# Altium PCB AlarmShield.PcbDoc (part 1 of 2)
Units mil, origin at the board's own origin, x right, y up, seen from the top; angles counter-clockwise.
Board outline 3700 x 2700 mil, 2 copper layers (Top Layer, Bottom Layer), stack 61.811 mil thick; 100 components, 79 nets, 356 pads, 76 vias.
Unrouted connection lines stored in the file: 2.
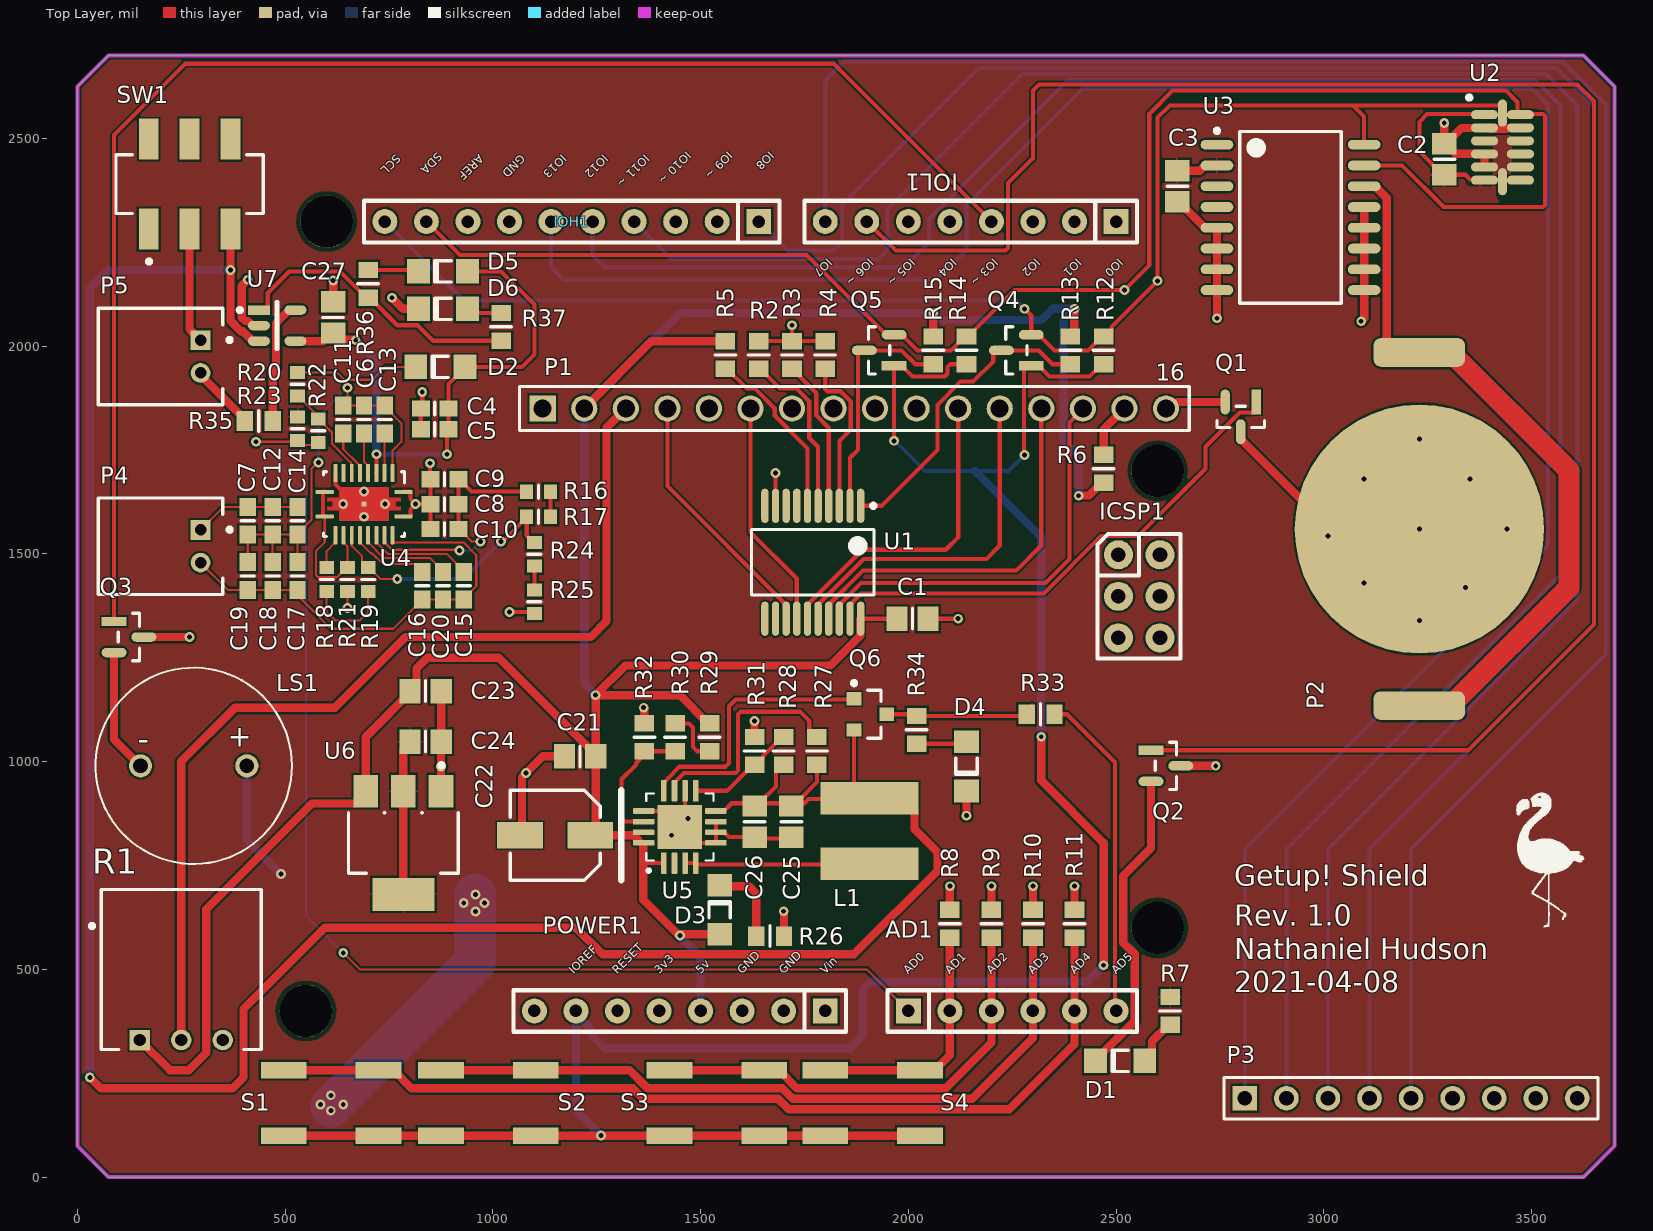
[diagram p0: Top Layer view]
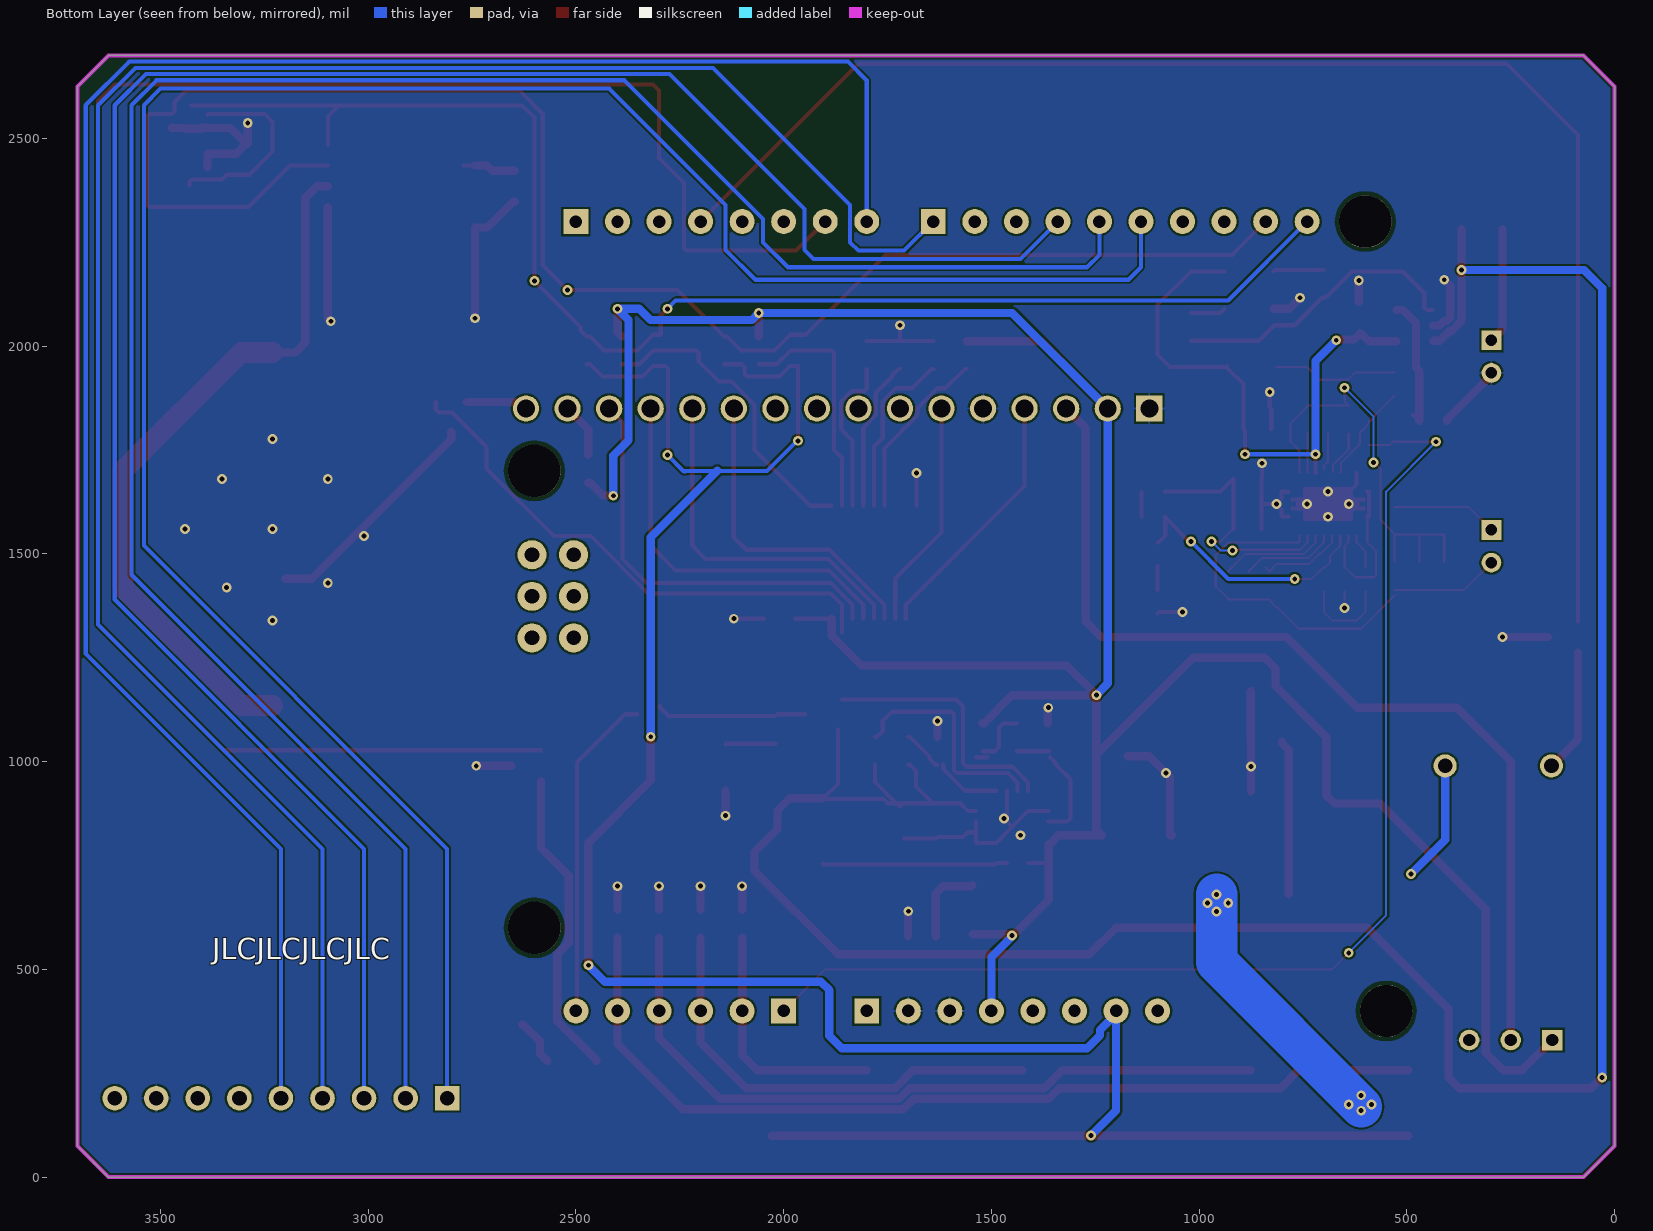
[diagram p1: Bottom Layer view, seen from below]

## Layer stack, top to bottom
Top Solder: solder mask 0.5, Solder Resist, Dk 3.8
Top Layer: signal copper 1.378
Dielectric: core 59.0551, FR-4, Dk 4.5
Bottom Layer: signal copper 1.378
Bottom Solder: solder mask 0.5, Solder Resist, Dk 3.8

## Board outline
0,75 0,2625 75,2700 3625,2700 3700,2625 3700,75 3625,0 75,0

## Design rules (kind name [scope] priority, off if disabled: settings)
BoardOutlineClearance [All] p1: gap=7.87 ignorepadtopadclearanceinfootprint=FALSE
Clearance [All] p1: gap=5 ignorepadtopadclearanceinfootprint=FALSE except(9.84: Arc-Hole Track-Hole SMDPad-Hole THPad-Hole Via-Hole Fill-Hole Poly-Hole Region-Hole Text-Hole)
ComponentClearance [All] p1: gap=5 collisioncheckmode=3 verticalgap=5 showdistances=TRUE
DiffPairsRouting [All] p1: maxlimit=10 minlimit=5 mostfreqgap=5 toplayer_minwidth=5 toplayer_maxwidth=1000 toplayer_prefwidth=5 bottomlayer_minwidth=5 bottomlayer_maxwidth=1000 bottomlayer_prefwidth=5 maxuncoupledlength=500
Height [All] p1: minheight=0 maxheight=71497.94 prefheight=500
HoleSize [All] p1: absolutevalues=TRUE maxlimit=248.03 minlimit=11.81 maxpercent=80.000 minpercent=20.000
HoleToHoleClearance [All] p1: gap=9.84 allowstackedmicrovias=FALSE
MinimumAnnularRing [All] p1: minimumring=3
MinimumSolderMaskSliver [All] p1: minsoldermaskwidth=0
PlaneClearance [All] p1: clearance=5
PlaneConnect PlaneConnectPowerPads [InPadClass('PowerPads')] p1: planeconnectstyle=Direct reliefexpansion=20 reliefentries=4 reliefconductorwidth=10 reliefairgap=10
PlaneConnect [All] p2: pad.planeconnectstyle=Relief pad.reliefexpansion=11.81 pad.reliefentries=4 pad.reliefconductorwidth=5 pad.reliefairgap=5 via.planeconnectstyle=Direct via.reliefexpansion=11.81 via.reliefentries=4 via.reliefconductorwidth=5 via.reliefairgap=5
PolygonConnect PolygonConnectPowerPads [All vs (InPadClass('PowerPads'))] p1: connectstyle=Direct reliefconductorwidth=10 reliefentries=4 polygonreliefangle="90 Angle" airgapwidth=10
PolygonConnect [All] p2: thpad.connectstyle=Relief thpad.reliefconductorwidth=5 thpad.reliefentries=4 thpad.polygonreliefangle="90 Angle" thpad.airgapwidth=5 smdpad.connectstyle=Relief smdpad.reliefconductorwidth=5 smdpad.reliefentries=4 smdpad.polygonreliefangle="90 Angle" smdpad.airgapwidth=5 via.connectstyle=Direct via.reliefconductorwidth=5 via.reliefentries=4 via.polygonreliefangle="90 Angle" via.airgapwidth=5
RoutingVias [All] p1: holewidth=11.81 width=23.62 viastyle="Through Hole" minholewidth=11.81 minwidth=23.62 maxholewidth=23.62 maxwidth=259.84
SilkToSilkClearance [All] p1: silktosilkclearance=0
SilkToSolderMaskClearance [IsPad] p1: minsilkscreentomaskgap=5 clearancetoexposedcopper=TRUE
SolderMaskExpansion [All] p1: expansion=2.95 istentingtop=FALSE
Width [All] p1: maxlimit=1000 minlimit=5 preferedwidth=5 minimp=50.000000 maximp=50.000000 favimp=50.000000
20 further rules are at their usual default settings.

## Classes and differential pairs
component class Power: C4 C5 C6 C7 C8 C9 C10 C11 C12 C13 C14 C15 C16 C17 C18 C19 C20 C21 C22 C23 C24 C25 C26 C27 D2 D3 D4 D5 D6 L1 P4 P5 Q6 R16 R17 R18 R19 R20 R21 R24 R26 R28 R30 R32 R35 R36 R37 SW1 U4 U5 U6 U7
component class AlarmShield: AD1 C1 C2 C3 D1 ICSP1 IOH1 IOL1 LS1 P1 P2 P3 POWER1 Q1 Q2 Q3 Q4 Q5 R1 R2 R3 R4 R5 R6 R7 R8 R9 R10 R11 R12 R13 R14 R15 S1 S2 S3 S4 U1 U2 U3

## Components (designator, comment, footprint, x,y, rotation, side; value= is the part's Value field where it differs from the comment)
AD1 "AD" "Header 6x1 8.5mm" 2000,400 r0 top locked
C1 "1uF" 0805 2010.21,1344.17 r0 top
C2 ".1uF" 0805 3290,2450 r90 top
C3 "1uF" 0805 2647.47,2385 r270 top
C4 "10uF" 0603 860,1850 r0 top
C5 "0.1uF" 0603 860,1800 r0 top
C6 "0.47uF" 0603 690,1823.46 r90 top
C7 "0.12uF" 0603 410,1579.94 r90 top
C8 "10uF" 0603 883.46,1620 r0 top
C9 "10uF" 0603 883.46,1680 r0 top
C10 "0.1uF" 0603 883.46,1560 r0 top
C11 "0.22uF" 0603 640,1823.46 r90 top
C12 "C-NP" 0603 470,1579.94 r90 top
C13 "10nF" 0603 740,1823.46 r90 top
C14 "C-NP" 0603 530,1579.94 r90 top
C15 "10nF" 0603 930,1423.46 r270 top
C16 "0.22uF" 0603 830,1423.46 r270 top
C17 "2000pF" 0603 530,1446.87 r270 top
C18 "C-NP" 0603 470,1446.87 r270 top
C19 "C-NP" 0603 410,1446.87 r270 top
C20 "0.47uF" 0603 880,1423.46 r270 top
C21 "2.2uF" 0805 1210,1012.91 r180 top
C22 "100uF" PNSC-FP-V-C_V 1150,822.91 r180 top
C23 "10uF" 0805 838.15,1170 r0 top
C24 "10uF" 0805 838.15,1048.39 r0 top
C25 "10uF" 0805 1718.39,855.71 r270 top
C26 "0.1uF" 0805 1630,855.71 r270 top
C27 "10uF" 0805 615.75,2069.32 r90 top
D1 "Blue" 1206_A_LED 2510,280 r0 top
D2 "Yellow" 1206_A_LED 873.58,1950 r0 top
D3 "Blue" 1206_A_LED 1545.63,643.58 r270 top
D4 "Yellow" 1206_A_LED 2140,988.94 r90 top
D5 "Yellow" 1206_A_LED 880,2180 r0 top
D6 "Blue" 1206_A_LED 880,2090 r0 top
ICSP1 "ICSP" ICSP 2505.51,1498.03 r0 top locked
IOH1 "IOH" "Header 10x1 8.5mm" 1640,2300 r180 top locked
IOL1 "IOL" "Header 8x1 8.5mm" 2500,2300 r180 top locked
L1 "MSS6132-472MLB" "COILCRAFT MSS6132 SERIES" 1906.54,912.09 r180 top
LS1 "CMT-1285C-035" CUI_CMT-1285C-035 280,990 r180 top
P1 "Display Header" 61301611121 1870,1850 r0 top
P2 "BH-67B-5" PCBComponent_1 3230,1135 r90 top
P3 "BT Header" HDR1X9 2810,190 r0 top
P4 "Coil" JST-S2B-PH-K-S_V 200,1518.41 r270 top
P5 "Lipo" JST-S2B-PH-K-S_V 200,1975 r270 top
POWER1 "POWER_UNO" "Header 8x1 8.5mm" 1800,400 r180 top locked
Q1 "BSS138" FP-318-08-IPC_B 2800,1830 r270 top
Q2 "BSS138" FP-318-08-IPC_B 2620,990 r0 top
Q3 "BSS138" FP-318-08-IPC_B 124.17,1300 r0 top
Q4 "BSS138" FP-318-08-IPC_B 2260,1990 r180 top
Q5 "BSS138" FP-318-08-IPC_B 1930,1990 r180 top
Q6 "MMUN2133LT1G" ONSC-SOT-23-3-318-08_V 1908.74,1114.14 r0 top
R1 "100k" FP-3386T-MFG 250,500 r0 top
R2 "10k" 0805_RES_HD 1640,1978.82 r90 top
R3 "10k" 0805_RES_HD 1720,1978.82 r90 top
R4 "10k" 0805_RES_HD 1800,1978.82 r90 top
R5 "10k" 0805_RES_HD 1559.8,1978.82 r90 top
R6 "220" 0805_RES_HD 2470,1704.95 r90 top
R7 "220" 0805_RES_HD 2630,400 r90 top
R8 "10k" 0805_RES_HD 2100,610 r270 top
R9 "10k" 0805_RES_HD 2200,610 r270 top
R10 "10k" 0805_RES_HD 2300,610 r270 top
R11 "10k" 0805_RES_HD 2400,610 r270 top
R12 "10k" 0805_RES_HD 2470,1990 r90 top
R13 "10k" 0805_RES_HD 2390,1990 r270 top
R14 "10k" 0805_RES_HD 2140,1990 r90 top
R15 "10k" 0805_RES_HD 2060,1990 r270 top
R16 "10k" 0603_RES_HD 1110,1649.49 r0 top
R17 "10k" 0603_RES_HD 1110,1589.49 r180 top
R18 "33" 0603_RES_HD 600,1438.54 r270 top
R19 "33" 0603_RES_HD 700,1438.54 r90 top
R20 "1.5k" 0603_RES_HD 530,1908.54 r270 top
R21 "10k" 0603_RES_HD 650,1438.54 r270 top
R22 "0" 0603_RES_HD 580,1796.54 r90 top
R23 "10k" 0603_RES_HD 530,1801.46 r270 top
R24 "150" 0603_RES_HD 1100,1499.17 r90 top
R25 "47" 0603_RES_HD 1100,1384.86 r90 top
R26 "1.5k" 0805_RES_HD 1667.2,580 r180 top
R27 "330k" 0805_RES_HD 1780,1025.95 r90 top
R28 "1.8M" 0805_RES_HD 1700,1025.95 r270 top
R29 "1.8M" 0805_RES_HD 1521.69,1058.75 r90 top
R30 "50k" 0805_RES_HD 1438.9,1058.75 r270 top
R31 "330k" 0805_RES_HD 1630,1025.95 r270 top
R32 "50k" 0805_RES_HD 1364.72,1058.75 r90 top
R33 "0" 0805_RES_HD 2318.4,1114.14 r180 top
R34 "1.5k" 0805_RES_HD 2020,1076.54 r90 top
R35 "2k" 0805_RES_HD 436.54,1820 r180 top
R36 "470" 0805_RES_HD 700,2150 r270 top
R37 "1k" 0805_RES_HD 1020,2046.54 r270 top
S1 "KSC221J" "ITT Cannon KSC2 Series" 496.65,100 r0 top
S2 "KSC221J" "ITT Cannon KSC2 Series" 875,100 r0 top
S3 "KSC221J" "ITT Cannon KSC2 Series" 1425,100 r0 top
S4 "KSC221J" "ITT Cannon KSC2 Series" 1800,100 r0 top
SW1 "JS202011SCQN" FP-JS202011SCQN-MFG 270,2390 r0 top
U1 "MCP23008-E/SS" SSOP-SS20_N 1770,1480 r270 top
U2 "ADI-ADXL34X-CC-14-1" ADXL 3430,2478.44 r0 top
U3 "DS3231S" W16-H2_L 2920,2310 r0 top
U4 "BQ51013BRHLR" RHL0020A_V 690,1620 r270 top
U5 "TPS61090RSAR" QFN65P400X400X100-17N 1450,842.91 r90 top
U6 "NCP1117LPST33T3G" FP-318H-MFG 784.65,804.53 r270 top
U7 "MCP73831T-2DCI/OT" FP-C04-091-OT-IPC_B 480.89,2049.63 r0 top

## Footprints (in the part's own frame and the unit in brackets; to place one, negate y for a bottom-side part, rotate by r counter-clockwise, add the part's x,y. Pads: shape width x height; smd on the part's side, far side on the other; paste and mask are expansions set on the pad)
0603 [mm] "Chip Capacitor; Body 1.6 x 0.8 mm (LxW typ)"
  rect 1.1x1 smd: 1(-0.85,0) 2(0.85,0)
  silkscreen extent 0,-0.4 0,0.4, body extent -0.8,-0.4 0.8,0.4, height 1
0603_RES_HD [mm] "Chip Resistor, 2-Leads, Body 1.60x0.85mm, IPC High Density"
  rect 0.8x0.9 smd: 1(-0.725,0) 2(0.725,0)
  silkscreen extent 0,-0.4 0,0.4, body extent -0.87,-0.48 0.87,0.48, height 0.55
0805 [mm] "Chip Capacitor; Body 2.0 x 1.2 mm (LxW typ)"
  rect 1.3x1.5 smd: 1(-0.95,0) 2(0.95,0)
  silkscreen extent 0,-0.64 0,0.64, body extent -1,-0.6 1,0.6, height 1.5
0805_RES_HD [mm] "Chip Resistor, 2-Leads, Body 2.00x1.25mm, IPC High Density"
  rect 1x1.2 smd: 1(-0.85,0) 2(0.85,0)
  silkscreen extent 0,-0.64 0,0.64, body extent -1.1,-0.68 1.1,0.67, height 0.65
1206_A_LED [mm] "Chip LED, 2-Leads, Body 3.2x1.6mm, IPC Medium Density"
  rect 1.4x1.5 smd: 1(-1.5,0) 2(1.5,0)
  silkscreen extent -0.5,-0.66 0.5,0.65, body extent -1.6,-0.8 1.6,0.8, height 0.68
61301611121 [mm] "Pin Header, pitch 2.54 mm, THT, Vertical, single row, 16p"
  round 1.6 hole 1.1: DB0(-3.81,0) DB1(-1.27,0) DB2(1.27,0) DB3(3.81,0) DB4(6.35,0) DB5(8.89,0) DB6(11.43,0) DB7(13.97,0) E(-6.35,0) LED+(16.51,0) LED-(19.05,0) R/W(-8.89,0) RS(-11.43,0) V0(-13.97,0) VDD(-16.51,0)
  rect 1.6x1.6 hole 1.1: VSS(-19.05,0)
  silkscreen extent -20.47,-1.35 20.47,1.35, body extent -20.32,-1.27 20.32,1.27, height 8.57
ADXL [mm] "QFN, 14-Leads, Body 5x3mm, Pitch 0.8mm"
  oval 1.653x0.55 smd: 1(-1.098,2) 2(-1.098,1.2) 3(-1.098,0.4) 4(-1.098,-0.4) 5(-1.098,-1.2) 6(-1.098,-2) 8(1.097,-2) 9(1.097,-1.2) 10(1.097,-0.4) 11(1.097,0.4) 12(1.097,1.2) 13(1.097,2)
  oval 0.55x1.653 smd: 7(0,-2.097) 14(0,2.098)
  silkscreen extent -2.16,2.92 -1.91,3.17, body extent -1.5,-2.5 1.5,2.5, height 1
"COILCRAFT MSS6132 SERIES" [mm] "SMT Power Inductor"
  rect 6x2 smd: 1(0,0) 2(0,4)
  body extent -3.1,-1.1 3.1,5.1, height 3.2
CUI_CMT-1285C-035 [mm]
  round 1.408 hole 0.9: N(3.25,0) P(-3.25,0)
  silkscreen extent -6,-6 6,6
FP-318-08-IPC_B [mm]
  rect 1.524x0.578 smd paste+0 mask+0: 1(-0.91,0.95)
  rrect100% 1.524x0.578 smd paste+0 mask+0: 2(-0.91,-0.95) 3(0.91,0)
  silkscreen extent -0.65,-1.45 0.65,1.45, body extent -1.92,-1.7 1.92,1.7, height 0.25
FP-318H-MFG [mm]
  rect 2x1.5 smd paste+0 mask+0: 1(-3.15,2.3) 2(-3.15,0) 3(-3.15,-2.3)
  rect 2x3.8 smd paste+0 mask+0: 4(3.15,0)
  silkscreen extent -4.87,-3.35 1.85,3.35, body extent -4.25,-3.68 4.25,3.68, height 0.25
FP-3386T-MFG [mm]
  rect 1.25x1.25 hole 0.75 paste-1000 mask+0: 1(-2.54,-4.318)
  round 1.25 hole 0.75 paste-1000 mask+0: 2(0,-4.318) 3(2.54,-4.318)
  silkscreen extent -5.57,-4.89 4.89,4.89, body extent -4.99,-4.99 4.99,4.99, height 0.25
FP-C04-091-OT-IPC_B [mm]
  rect 1.338x0.578 smd paste+0 mask+0: 1(-1.116,0.95)
  rrect100% 1.338x0.578 smd paste+0 mask+0: 2(-1.116,0) 3(-1.116,-0.95) 4(1.116,-0.95) 5(1.116,0.95)
  silkscreen extent -2.41,-1.45 0.05,1.45
FP-JS202011SCQN-MFG [mm]
  rect 1.2x2.5 smd paste+0 mask+0: 1(-2.5,-2.75) 2(0,-2.75) 3(2.5,-2.75) 4(-2.5,2.75) 5(0,2.75) 6(2.5,2.75)
  silkscreen extent -4.5,-4.85 4.5,1.8
HDR1X9 [mm] "Connector; Header; 9 Position"
  rect 1.5x1.5 hole 0.9: 1(0,0)
  round 1.5 hole 0.9: 2(2.54,0) 3(5.08,0) 4(7.62,0) 5(10.16,0) 6(12.7,0) 7(15.24,0) 8(17.78,0) 9(20.32,0)
  silkscreen extent -1.27,-1.27 21.59,1.27
"Header 6x1 8.5mm" [mil] "Stackable 6 pin header"
  rect 60x60 hole 30: 1(0,0)
  round 60 hole 30: 2(100,0) 3(200,0) 4(300,0) 5(400,0) 6(500,0)
  silkscreen extent -50,-50 550,50, body extent -50,-50 550,50, height 335
"Header 8x1 8.5mm" [mil] "Stackable 8 pin header"
  rect 60x60 hole 30: 1(0,0)
  round 60 hole 30: 2(100,0) 3(200,0) 4(300,0) 5(400,0) 6(500,0) 7(600,0) 8(700,0)
  silkscreen extent -50,-50 750,50, body extent -50,-50 750,50, height 335
"Header 10x1 8.5mm" [mil] "Stackable 10 pin header"
  rect 60x60 hole 30: 1(0,0)
  round 60 hole 30: 2(100,0) 3(200,0) 4(300,0) 5(400,0) 6(500,0) 7(600,0) 8(700,0) 9(800,0) 10(900,0)
  silkscreen extent -50,-50 950,50, body extent -50,-50 950,50, height 335
ICSP [mil]
  round 70 hole 35.43: 1(0,0) 2(100,0) 3(0,-100) 4(100,-100) 5(0,-200) 6(100,-200)
  silkscreen extent -50,-250 150,50, body extent -50,-250 150,50, height 485
"ITT Cannon KSC2 Series" [mm] "SWITCH TACT SILVER J-LEAD"
  rect 2.8x1 smd: 1(0,0) 1(5.8,0) 2(0,4) 2(5.8,4)
  body extent -0.5,-1.4 6.3,5.4, height 3.55
JST-S2B-PH-K-S_V [mm] "THD, 2-Leads, Body 7.6x5.9mm, Pitch 2mm"
  rect 1.2x1.2 hole 0.7: 1(-1,2.45)
  round 1.2 hole 0.7: 2(1,2.45)
  silkscreen extent -2.95,-3.8 2.95,4.35, body extent -2.95,-3.8 2.95,3.8, height 4.8
ONSC-SOT-23-3-318-08_V [mm] "SOT23, 3-Leads, Body 2.92x1.3mm, Pitch 0.95mm"
  rect 0.9x0.8 smd: 1(-1,0.95) 2(-1,-0.95) 3(1,0)
  silkscreen extent -1.12,-1.46 0.65,2.02, body extent -0.65,-1.46 0.65,1.46, height 1.11
PCBComponent_1 [mil]
  rrect50% 69x220 smd: 1(0,0) 1(850,0)
  round 600 smd: 2(425,0)
PNSC-FP-V-C_V [mm] "CAPAE, 2-Leads, Body 5.50x5.50mm"
  rect 2.8x1.6 smd: 1(-2.15,0) 2(2.15,0)
  silkscreen extent -4.05,-2.75 2.75,2.75, body extent -3.25,-2.75 3.25,2.75, height 6.1
QFN65P400X400X100-17N [mm]
  rrect30% 1.318x0.34 smd: 1(-2.209,0.975) 2(-2.209,0.325) 3(-2.209,-0.325) 4(-2.209,-0.975) 9(2.209,-0.975) 10(2.209,-0.325) 11(2.209,0.325) 12(2.209,0.975)
  rrect30% 0.34x1.318 smd: 5(-0.975,-2.209) 6(-0.325,-2.209) 7(0.325,-2.209) 8(0.975,-2.209) 13(0.975,2.209) 14(0.325,2.209) 15(-0.325,2.209) 16(-0.975,2.209)
  rect 2.7x2.7 smd paste-0.497: 17(0,0)
  silkscreen extent -2.77,-2.05 2.05,2.05, body extent -2,-2 2,2, height 1
RHL0020A_V [mm] "QFN, 20-Leads, Body 4.5x3.5mm, Pitch 0.5mm, Thermal Pad 3.05x2.05mm, TI Recommended"
  rrect42% 0.24x1.108 smd: 1(-0.75,2.404) 10(-0.75,-2.404) 11(0.75,-2.404) 20(0.75,2.404)
  rrect42% 1.108x0.24 smd: 2(-1.904,1.75) 3(-1.904,1.25) 4(-1.904,0.75) 5(-1.904,0.25) 6(-1.904,-0.25) 7(-1.904,-0.75) 8(-1.904,-1.25) 9(-1.904,-1.75) 12(1.904,-1.75) 13(1.904,-1.25) 14(1.904,-0.75) 15(1.904,-0.25) 16(1.904,0.25) 17(1.904,0.75) 18(1.904,1.25) 19(1.904,1.75)
  rrect33% 0.3x0.3 smd paste-0.15 mask+0: 21(0,0)
  Top Layer region: 0.16,2.25 0.16,1.925 -0.16,1.925 -0.16,2.25 -0.39,2.25 -0.39,1.525 -1.025,1.525 -1.025,-1.525 -0.39,-1.525 -0.39,-2.25 -0.16,-2.25 -0.16,-1.925 0.16,-1.925 0.16,-2.25 0.39,-2.25 0.39,-1.525 1.025,-1.525 1.025,1.525 0.39,1.525 0.39,2.25
  silkscreen extent -1.98,-2.47 1.98,2.47, body extent -1.82,-2.33 1.83,2.32, height 1.01
SSOP-SS20_N [mm] "SOP, 20-Leads, Body 7.2x5.2mm, Pitch 0.65mm, IPC Medium Density"
  oval 2.1x0.45 smd: 1(-3.45,2.925) 2(-3.45,2.275) 3(-3.45,1.625) 4(-3.45,0.975) 5(-3.45,0.325) 6(-3.45,-0.325) 7(-3.45,-0.975) 8(-3.45,-1.625) 9(-3.45,-2.275) 10(-3.45,-2.925) 11(3.45,-2.925) 12(3.45,-2.275) 13(3.45,-1.625) 14(3.45,-0.975) 15(3.45,-0.325) 16(3.45,0.325) 17(3.45,0.975) 18(3.45,1.625) 19(3.45,2.275) 20(3.45,2.925)
  silkscreen extent -3.57,-3.75 2,3.83, body extent -2.8,-3.75 2.8,3.75, height 2
W16-H2_L [mm] "SOIC, 16-Leads, Body 10.3x7.5mm, Pitch 1.27mm, IPC High Density"
  oval 2x0.6 smd: 1(-4.5,4.445) 2(-4.5,3.175) 3(-4.5,1.905) 4(-4.5,0.635) 5(-4.5,-0.635) 6(-4.5,-1.905) 7(-4.5,-3.175) 8(-4.5,-4.445) 9(4.5,-4.445) 10(4.5,-3.175) 11(4.5,-1.905) 12(4.5,-0.635) 13(4.5,0.635) 14(4.5,1.905) 15(4.5,3.175) 16(4.5,4.445)
  silkscreen extent -4.62,-5.25 3.1,5.42, body extent -3.8,-5.25 3.8,5.25, height 2.65

## Part data
AD1: Supplier Part Number 1=2699089, Supplier 1=Arrow, Supplier 2=Digi-Key, Supplier 3=Arrow, Supplier 4=Arrow, Supplier Part Number 2=SAM1198-06-ND, Supplier Part Number 3=2699088, Supplier Part Number 4=2699075
C1 C2 C3 C21 C23 C24 C25 C26 C27: library part CC0805KRX7R9BB152, "1.5nF, 10%, 50V", Manufacturer 1=Yageo, Supplier Part Number 1=311-1128-1-ND, GFUPartNo=CC0805KRX7R9BB152, Manufacturer Part Number 1=CC0805KRX7R9BB152, PackageReference=0805, Part Type=SMT, Supplier 1=Digi-Key
C4 C8 C9: library part C1608C0G1H361J, "10uF, 10%, 25V", Manufacturer 1=TDK, Supplier Part Number 1=445-5067-1-ND, GFUPartNo=C1608C0G1H361J, Manufacturer Part Number 1=C1608C0G1H361J, PackageReference=0603, Part Type=SMT, Supplier 1=Digi-Key
C5 C10: library part C1608C0G1H361J, "0.1uF, 10%, 50V", Manufacturer 1=TDK, Supplier Part Number 1=445-5067-1-ND, GFUPartNo=C1608C0G1H361J, Manufacturer Part Number 1=C1608C0G1H361J, PackageReference=0603, Part Type=SMT, Supplier 1=Digi-Key
C6 C20: library part C1608C0G1H361J, "0.47uF, 10%, 25V", Manufacturer 1=TDK, Supplier Part Number 1=445-5067-1-ND, GFUPartNo=C1608C0G1H361J, Manufacturer Part Number 1=C1608C0G1H361J, PackageReference=0603, Part Type=SMT, Supplier 1=Digi-Key
C7 C12 C14: library part C1608C0G1H361J, "0.12 uF, 10%, 25V", Manufacturer 1=TDK, Supplier Part Number 1=445-5067-1-ND, GFUPartNo=C1608C0G1H361J, Manufacturer Part Number 1=C1608C0G1H361J, PackageReference=0603, Part Type=SMT, Supplier 1=Digi-Key
C11 C16: library part C1608C0G1H361J, "0.22uF, 10%, 25V", Manufacturer 1=TDK, Supplier Part Number 1=445-5067-1-ND, GFUPartNo=C1608C0G1H361J, Manufacturer Part Number 1=C1608C0G1H361J, PackageReference=0603, Part Type=SMT, Supplier 1=Digi-Key
C13 C15: library part C1608C0G1H361J, "10nF, 10%, 25V", Manufacturer 1=TDK, Supplier Part Number 1=445-5067-1-ND, GFUPartNo=C1608C0G1H361J, Manufacturer Part Number 1=C1608C0G1H361J, PackageReference=0603, Part Type=SMT, Supplier 1=Digi-Key
C17 C18 C19: library part C1608C0G1H361J, "2000 pF, 10%, 50V", Manufacturer 1=TDK, Supplier Part Number 1=445-5067-1-ND, GFUPartNo=C1608C0G1H361J, Manufacturer Part Number 1=C1608C0G1H361J, PackageReference=0603, Part Type=SMT, Supplier 1=Digi-Key
C22: library part CMP-2000-06213-1, "EEE-HA Series 6.3 V 100 uF Ø 5 x 5.4 mm 105 °C SMT V-Chip Aluminum Electrolytic. EEE-HA0J101WR", Capacitance=22µF, Case Size/Dimension=Ø5x5.8mm, ESR (Equivalent Series Resistance)=0.36O, Lifetime@Temperature=2000Hrs@105°C, Manufacturer=Panasonic, Operating Temp Range=-55to+105°C, Operating Temp-Max=105°C, Package Description="2-Pin Electrolytic Aluminum Capacitor, Body 5.3 x 5.3 mm", Package Reference=FP-V-C, Rated Voltage=25V, Ripple Current=240mA, Datasheet URL=http://industrial.panasonic.com/cdbs/www-data/pdf/RDE0000/ABA0000C1184.pdf, Datasheet Version=03/2016, Manufacturer URL=http://www.panasonic.com/, Mounting Technology=SurfaceMount, Package URL=http://industrial.panasonic.com/cdbs/www-data/pdf/RDE0000/DME0000COL48.pdf, Series=FP, Type=Can
D1 D2 D3 D4 D5 D6: library part WE-LED_K1A2-2_Local
ICSP1: Supplier Part Number 1=2699117, Supplier 1=Arrow, Supplier 2=Arrow, Supplier 3=Digi-Key, Supplier 4=Arrow, Supplier 5=Digi-Key, Supplier Part Number 2=2699116, Supplier Part Number 3=SAM1185-06-ND, Supplier Part Number 4=2699091, Supplier Part Number 5=SAM1196-06-ND
IOH1: Supplier Part Number 1=2698803S4475693N1004, Supplier 1=Arrow, Supplier 2=Digi-Key, Supplier 3=Arrow, Supplier Part Number 2=SAM1198-10-ND, Supplier Part Number 3=2698789
IOL1 POWER1: Supplier Part Number 1=SAM1198-08-ND, Supplier 1=Digi-Key, Supplier 2=Arrow, Supplier 3=Arrow, Supplier 4=Arrow, Supplier Part Number 2=2698939, Supplier Part Number 3=2698940, Supplier Part Number 4=2698925
L1: "INDUCTOR POWER 4.7UH SHIELDED SMD", Current=2.3A, Inductance=4.7uH, Manufacturer 1=Coilcraft, Tolerance=20%, GFUPartNo=MSS6132-472MLB, Manufacturer Part Number 1=MSS6132-472MLB, Part Type=SMT, Shielded=YES, Supplier 1=Coilcraft, Supplier 2=Coilcraft, Supplier Order Qty 1=1, Supplier Order Qty 2=100, Supplier Part Number 1=MSS6132-472MLB, Supplier Part Number 2=MSS6132-472MLB, Supplier Unit Price 1=0.94, Supplier Unit Price 2=0.94
LS1: "12 mm, 3.5 Vo-p, 91 dB, Through Hole, Magnetic Audio Transducer Buzzer", Package="TO-220 CUI Inc.", Arrow_Electronics-Purchase-URL=https://snapeda.com/shop?store=Arrow+Electronics&id=2772240, Availability=Good, CUI_purchase_URL=https://www.cuidevices.com/product/audio/buzzers/audio-transducers/cmt-1285c-035?utm_source=snapeda.com&utm_medium=referral&utm_campaign=snapedaBOM, MF="CUI Devices", Mouser-Purchase-URL=https://snapeda.com/shop?store=Mouser&id=2772240, MP=CMT-1285C-035, Price=None, SnapEDA_Link=https://www.snapeda.com/parts/CMT-1285C-035/CUI%20Devices/view-part/2772240/?ref=snap
P1: library part CMP-1502-01095-1, "THT Vertical Pin Header WR-PHD, Pitch 2.54 mm, Single Row, 16 pins", Contact Resistance=20mOhm, Manufacturer="Wurth Elektronik", Operating Temperature=-40to105degC, Package Reference=61301611121, Rated Current=3A, Withstanding Voltage=500VAC, Working Voltage=250VAC, Datasheet URL=https://katalog.we-online.de/em/datasheet/6130xx11121.pdf, Gender=Male, Manufacturer URL=http://www.we-online.de, Mounting Technology=THT, Orientation=Vertical, Packaging=Bag, Part Number=61301611121, Pin Number=16, Pitch=2.54mm, Publisher=WurthElektronik, Row Number=Single
P2: "BATTERY HOLDER CR 2032"
P3: library part "Header 9", "Header, 9-Pin", LatestRevisionDate=17-Jul-2002, LatestRevisionNote="Re-released for DXP Platform.", Publisher="Altium Limited"
P4 P5: library part CMP-1755-00004-1, "Male Header, Pitch 2 mm, 1 x 2 Position, Height 4.8 mm, Tail Length 3.4 mm, -25 to 85 degC, RoHS, Bulk", Capacitance="10 uF", Case\Package=Radial, Max Operating Temperature="85 degC", Min Operating Temperature="-40 degC", Package Quantity=200, Tolerance=20%, Voltage Rating="50 V", ComponentLink1Description=Datasheet, ComponentLink1URL=http://www.jst-mfg.com/product/pdf/eng/ePH.pdf, DatasheetVersion=Dec-12, Diameter="5 mm", Height="11 mm", Lead Pitch="2 mm", Length="11 mm", Mount="Through Hole", PackageDescription="Male Header, Pitch 2 mm, 1 x 2 Position, Height 4.8 mm, Tail Length 3.4 mm", PackageReference=S2B-PH-K-S, Packaging=Bulk, Pins=2, Radiation Hardening=No, REACH SVHC="No SVHC", RoHSCompliant=true, Voltage Rating (DC)="50 V"
Q1 Q2 Q3 Q4 Q5: library part CMP-07173-000101-1, "MOSFET N-CH 50V 220MA SOT-23", Case/Package=SOT-23, Continuous Drain Current (ID)=220mA, Drain to Source Breakdown Voltage=50V, Drain to Source Resistance=3.5R, Gate to Source Voltage (Vgs)=20V, Input Capacitance=27pF, Max Operating Temperature=150°C, Max Power Dissipation=360mW, Min Operating Temperature=-55°C, On-State Resistance=6R, Package Quantity=1, Threshold Voltage=1.3V, Contact Plating=Tin, Current Rating=220mA, Drain to Source Voltage (Vdss)=50V, Dual Supply Voltage=50V, Element Configuration=Single, Fall Time=9ns, Height=0.93mm, Lead Free="Lead Free", Length=2.92mm, Mount="Surface Mount", Nominal Vgs=1.3V, Number of Elements=1, Number of Pins=3, Packaging="Tape and Reel", Power Dissipation=360mW, Radiation Hardening=No, Rds On Max=3.5R, REACH SVHC="No SVHC", Rise Time=9ns, Termination=SMD/SMT, Turn-Off Delay Time=20ns, Turn-On Delay Time=2.5ns, Voltage Rating (DC)=50V, Weight=0.03g, Width=1.3mm
Q6: library part CMP-0630-00284-1, "Digital Transistor (BRT), R1=4.7 kOhm, R2=47 kOhm, PNP Transistor, 3-Pin SOT-23, Pb-Free, Tape and Reel", Manufacturer="On Semiconductor", ComponentLink1Description="Manufacturer URL", ComponentLink1URL=http://www.onsemi.com/, ComponentLink2Description=Datasheet, ComponentLink2URL=http://www.onsemi.cn/pub_link/Collateral/DTA143Z-D.PDF, ComponentLink3Description="Package Specification", ComponentLink3URL=http://www.onsemi.cn/pub_link/Collateral/318-08.PDF, DatasheetVersion="Rev. 6", hFE Min=80, IC Continuous (A)=0.1, Mounting Technology="Surface Mount", PackageDescription="3-Pin Small Outline Transistor, Body 2.92 x 1.3 mm, Pitch 0.95 mm", PackageReference=SOT-23-3-318-08, PackageVersion="Rev. AP, 11/2009", Packing="Tape and Reel", PartNumber=MMUN2133LT1G, Polarity=PNP, R1/R2 Typ=0.1, RoHS=TRUE, V(BR)CEO Min (V)=50
R1: library part 3386T_1_103TLF, "Contrast Trim Potentiometer"
R2 R3 R4 R5 R6 R7 R8 R9 R10 R11 R12 R13 R14 R15 R30 R32: library part RC0805FR-07100RL, "50k Ohm ±1% 0.125W, 1/8W Surface Mount Resistor Thick Film ±100ppm/°C 0805", Manufacturer 1=Yageo, Supplier Part Number 1=311-100CRCT-ND, GFUPartNo=RC0805FR-07100RL, Manufacturer Part Number 1=RC0805FR-07100RL, Part Type=SMT, Supplier 1=Digi-Key
R16 R17 R21: library part RC0603JR-0718RL, "RES 10k OHM 1/10W 5% 0603 SMD", Manufacturer 1=Yageo, Supplier Part Number 1=311-18GRCT-ND, GFUPartNo=RC0603JR-0718RL, Manufacturer Part Number 1=RC0603JR-0718RL, Part Type=SMT, Supplier 1=Digi-Key
R18 R19: library part RC0603JR-0718RL, "RES 33 OHM 1/10W 5% 0603 SMD", Manufacturer 1=Yageo, Supplier Part Number 1=311-18GRCT-ND, GFUPartNo=RC0603JR-0718RL, Manufacturer Part Number 1=RC0603JR-0718RL, Part Type=SMT, Supplier 1=Digi-Key
R20 R22 R23: library part RC0603JR-0718RL, "RES 1.5k OHM 1/10W 5% 0603 SMD", Manufacturer 1=Yageo, Supplier Part Number 1=311-18GRCT-ND, GFUPartNo=RC0603JR-0718RL, Manufacturer Part Number 1=RC0603JR-0718RL, Part Type=SMT, Supplier 1=Digi-Key
R24: library part RC0603JR-0718RL, "RES 150 OHM 1/10W 5% 0603 SMD", Manufacturer 1=Yageo, Supplier Part Number 1=311-18GRCT-ND, GFUPartNo=RC0603JR-0718RL, Manufacturer Part Number 1=RC0603JR-0718RL, Part Type=SMT, Supplier 1=Digi-Key
R25: library part RC0603JR-0718RL, "RES 47 OHM 1/10W 5% 0603 SMD", Manufacturer 1=Yageo, Supplier Part Number 1=311-18GRCT-ND, GFUPartNo=RC0603JR-0718RL, Manufacturer Part Number 1=RC0603JR-0718RL, Part Type=SMT, Supplier 1=Digi-Key
R26 R33 R34: library part RC0805FR-07100RL, "1.5kOhm ±1% 0.125W, 1/8W Surface Mount Resistor Thick Film ±100ppm/°C 0805", Manufacturer 1=Yageo, Supplier Part Number 1=311-100CRCT-ND, GFUPartNo=RC0805FR-07100RL, Manufacturer Part Number 1=RC0805FR-07100RL, Part Type=SMT, Supplier 1=Digi-Key
R27 R31: library part RC0805FR-07100RL, "330kOhm ±1% 0.125W, 1/8W Surface Mount Resistor Thick Film ±100ppm/°C 0805", Manufacturer 1=Yageo, Supplier Part Number 1=311-100CRCT-ND, GFUPartNo=RC0805FR-07100RL, Manufacturer Part Number 1=RC0805FR-07100RL, Part Type=SMT, Supplier 1=Digi-Key
R28: library part RC0805FR-07100RL, "1.8MOhm ±1% 0.125W, 1/8W Surface Mount Resistor Thick Film ±100ppm/°C 0805", Manufacturer 1=Yageo, Supplier Part Number 1=311-100CRCT-ND, GFUPartNo=RC0805FR-07100RL, Manufacturer Part Number 1=RC0805FR-07100RL, Part Type=SMT, Supplier 1=Digi-Key
R29: library part RC0805FR-07100RL, "100 Ohm ±1% 0.125W, 1/8W Surface Mount Resistor Thick Film ±100ppm/°C 0805", Manufacturer 1=Yageo, Supplier Part Number 1=311-100CRCT-ND, GFUPartNo=RC0805FR-07100RL, Manufacturer Part Number 1=RC0805FR-07100RL, Part Type=SMT, Supplier 1=Digi-Key
R35: library part RC0805FR-07100RL, "20kOhm ±1% 0.125W, 1/8W Surface Mount Resistor Thick Film ±100ppm/°C 0805", Manufacturer 1=Yageo, Supplier Part Number 1=311-100CRCT-ND, GFUPartNo=RC0805FR-07100RL, Manufacturer Part Number 1=RC0805FR-07100RL, Part Type=SMT, Supplier 1=Digi-Key
R36 R37: library part RC0805FR-07100RL, "470Ohm ±1% 0.125W, 1/8W Surface Mount Resistor Thick Film ±100ppm/°C 0805", Manufacturer 1=Yageo, Supplier Part Number 1=311-100CRCT-ND, GFUPartNo=RC0805FR-07100RL, Manufacturer Part Number 1=RC0805FR-07100RL, Part Type=SMT, Supplier 1=Digi-Key
S1 S2 S3 S4: "SWITCH TACT SILVER J-LEAD", Manufacturer 1="ITT Cannon", Supplier Part Number 1=401-1758-1-ND, GFUPartNo=KSC221J, Manufacturer Part Number 1=KSC221J, Part Type=SMT, Supplier 1=Digi-Key
SW1: library part CMP-2000-05087-2, "SWITCH SLIDE DPDT 300MA 6V", Contact Current Rating=300mA, Contact Resistance=70mR, Flammability Rating="UL94 V-2", Max Operating Temperature=85°C, Max Voltage Rating (DC)=6V, Min Operating Temperature=-20°C, Package Quantity=1, Actuator Length=2mm, Actuator Material=Nylon, Actuator Type=Standard, Contact Material="Copper Alloy", Contact Plating=Silver, Current Rating=300mA, Depth=7.5mm, Electrical Life=5000Cycles, Housing Material=Nylon, Lead Free="Lead Free", Length=9mm, Max Current Rating=300mA, Mount="Surface Mount", Orientation=Vertical, Packaging="Tape and Reel", Radiation Hardening=No, REACH SVHC="No SVHC", Switch Function=On-On, Switch Travel=2mm, Termination="Gull Wing", Throw Configuration=DPDT, Voltage Rating (DC)=6V
U1: library part CMP-0186-00169-3, "8-Bit I/O Expander with Serial Interface, 20-Pin SSOP, Extended Temperature", Code_JEDEC=MO-150, ComponentLink1Description="Manufacturer URL", ComponentLink1URL=http://www.microchip.com/, ComponentLink2Description=Datasheet, ComponentLink2URL=http://ww1.microchip.com/downloads/en/DeviceDoc/21919e.pdf, ComponentLink3Description="Package Specification", ComponentLink3URL=http://www.microchip.com/stellent/groups/techpub_sg/documents/packagingspec/en012702.pdf, DatasheetVersion="revE, Aug-2007", PackageDescription="20-Lead Plastic Shrink Small Outline (SS) - 5.3mm Body [SSOP]", PackageReference=SSOP-SS20, PackageVersion="revBB, Aug-2009", RevisionNote="Sch corrected."
U3: library part CMP-0254-00244-1, "Extremely Accurate I2C-Integrated Real-Time Clock/TCXO/Crystal, 16-Pin SO, 0 to 70 degC", Code_IPC=SOIC127P1030-16, Code_JEDEC=MS-013-AA, ComponentLink1Description="Manufacturer URL", ComponentLink1URL=http://www.maxim-ic.com, ComponentLink2Description=Datasheet, ComponentLink2URL=http://datasheets.maxim-ic.com/en/ds/DS3231.pdf, ComponentLink3Description="Package Specification", ComponentLink3URL=http://pdfserv.maxim-ic.com/package_dwgs/21-0042.PDF, DatasheetVersion="Rev 8, Jul-2010", PackageDescription="16-Pin Small-Outline IC, Wide (0.3in), 1.27 mm Pitch, SOIC (W)", PackageReference=W16-H2, PackageVersion="revD, 2010"
U4: library part CMP-0393-00005-2, "WPC 1.1 Compatible Fully Integrated Wireless Power Receiver IC, 4 V Min Input, 20-pin VQFN (RHL), Green (RoHS & no Sb/Br)", PartNumber=BQ51013B, ComponentLink1Description="Manufacturer URL", ComponentLink1URL=http://www.ti.com/, ComponentLink2Description=Datasheet, ComponentLink2URL=http://www.ti.com/lit/ds/symlink/bq51013b.pdf, ComponentLink3Description="Package Specification", ComponentLink3URL=http://www.ti.com/lit/ds/symlink/bq51051b.pdf, DatasheetVersion=SLUSB62, Eco-Plan=TRUE, Mounting Technology="Surface Mount", PackageDescription="20-Pin Plastic Flat Pack, Body 4.5 x 3.5 mm, Pitch 0.5 mm", PackageReference=RHL0020A, PackageVersion="4205346-3/J, 12/2011", Vin(Min)(V)=4
U5: "1.8Vin, 2A Switch, 96% Efficient Boost Converter 16-QFN -40 to 85", Package="VQFN-16 Texas Instruments", Availability=Good, Check_prices=https://www.snapeda.com/parts/TPS61090RSAR/Texas%20Instruments/view-part/51689/?ref=eda, MF="Texas Instruments", MP=TPS61090RSAR, Price=None, Purchase-URL=https://pricing.snapeda.com/search/part/TPS61090RSAR/?ref=eda, SnapEDA_Link=https://www.snapeda.com/parts/TPS61090RSAR/Texas%20Instruments/view-part/51689/?ref=snap
U6: library part CMP-07128-000031-1, "IC REG LINEAR 3.3V 1A SOT223", Case/Package=SOT-223, Dropout Voltage=1.3V, Max Input Voltage=18V, Max Operating Temperature=125°C, Max Output Current=1A, Min Current Limit=1.1A, Min Input Voltage=-300mV, Min Operating Temperature=0°C, Min Output Voltage=3.3V, Package Quantity=1, Power Supply Rejection Ratio (PSRR)=60dB, Quiescent Current=700uA, Reference Voltage=1.275V, Contact Plating=Tin, Halogen Free="Halogen Free", Height=1.69mm, Lead Free="Lead Free", Length=6.7mm, Mount="Surface Mount", Nominal Output Voltage=3.3V, Number of Outputs=1, Number of Pins=3, Number of Regulators=1, Output Current=1A, Output Type=Fixed, Output Voltage=3.3V, Packaging="Tape and Reel", Polarity=Positive, REACH SVHC="No SVHC", Width=3.7mm
U7: library part CMP-0133-00146-2, "IC CONTROLLR LI-ION 4.2V SOT23-5", Case/Package=SOT-23, Max Charge Current=500mA, Max Input Voltage=3.75V, Max Operating Temperature=85°C, Max Output Voltage=4.232V, Max Supply Voltage=6V, Min Operating Temperature=-40°C, Min Output Voltage=4.168V, Operating Supply Current=510uA, Output Voltage=4.2V, Package Quantity=3000, Contact Plating=Tin, Height=1.3mm, Lead Free="Lead Free", Length=3.1mm, Max Output Current=500mA, Min Supply Voltage=3.75V, Mount="Surface Mount", Number of Cells=1, Number of Channels=1, Number of Pins=5, Output Current=500mA, Packaging="Tape and Reel", Radiation Hardening=No, REACH SVHC="No SVHC", Width=1.8mm

## Free pads (board coordinates)
  round 125.98 hole 125.98: 0(550,400) 0(600,2300) 0(2600,600) 0(2600,1700)

## Via types
v1: diameter 23.62, hole 11.81, Top Layer to Bottom Layer, 76 vias

## Nets (pads, with @x,y where several pads share a name; then routed paths per layer and width w, separated by ;. In a path a pad name is that pad's centre, name@x,y a point inside that pad or via, vN(x,y) a via of type N, cw(c..) or ccw(c..) an arc to the next point about the centre after c; other vN are vias at no path point)
ADXL_IRQ1: U2.8
ADXL_IRQ1_HV: IOH1.3
ADXL_IRQ2: U2.9
ADXL_IRQ2_HV: IOH1.2
BATT_LOW: AD1.6 R33.1 | length 792.9
  Top Layer w10: R33.1 2381.62,1114.14 2497.17,998.6 2497.17,402.83 AD1.6
BT_CS: IOH1.1 P3.4 | length 4924.9
  Bottom Layer w10: IOH1.1 1710,2230 1820,2230 1840,2250 1840,2340 2170,2670 3560,2670 3650,2580 3650,1330 3110,790 P3.4
BT_DFU: P3.6
BT_IRQ: IOL1.8 P3.5 | length 4866.8
  Bottom Layer w10: IOL1.8 1800,2640 1845,2685 3575,2685 3680,2580 3680,1260 3210,790 P3.5
BT_RST: P3.7
BTN_MINUS: AD1.3 R9.2 S3.2 | length 1091.6
  Top Layer w20: S3.2@1425,257.48 1653.35,257.48 1688.78,257.48 1732.64,213.62 2090,213.62 2200,323.62 AD1.3 R9.2
BTN_PLUS: AD1.2 R8.2 S4.2 | length 597.8
  Top Layer w20: S4.2@1800,257.48 2028.35,257.48 2063.78,257.48 2100,293.7 AD1.2 R8.2
BTN_SEL: AD1.4 R10.2 S2.2 | length 1755.5
  Top Layer w20: S2.2@875,257.48 1103.35,257.48 1328.98,257.48 1372.84,213.62 1697.28,213.62 1722.28,188.62 2153.27,188.62 2300,335.36 R10.2
BTN_SET: AD1.5 R11.2 S1.2 | length 2263.5
  Top Layer w20: S1.2@496.65,257.48 725,257.48 760.43,257.48 804.29,213.62 1337.49,213.62 1362.49,188.62 1686.93,188.62 1711.93,163.62 2243.62,163.62 2400,320 R11.2
BUZZER: IOL1.4 Q3.1 | length 3511.1
  Top Layer w10: Q3.1 88.33,2508.33 260,2680 1820,2680 IOL1.4
D4_HV: P1.DB4 U1.15 | length 773.6
  Top Layer w10: U1.15 1757.2,1377.73 1889.47,1510 2090,1510 2120,1540 P1.DB4
D5_HV: P1.DB5 U1.16 | length 859.7
  Top Layer w10: U1.16 1782.8,1377.73 1892.78,1487.72 2187.72,1487.72 2220,1520 P1.DB5
D6_HV: P1.DB6 U1.17 | length 934.1
  Top Layer w10: U1.17 1808.39,1377.73 1890.65,1460 2260,1460 2320,1520 P1.DB6
D7_HV: P1.DB7 U1.18 | length 1008.5
  Top Layer w10: U1.18 1833.98,1377.73 1886.24,1430 2330,1430 2388.19,1488.19 2388.19,1816.06 2420,1847.87 P1.DB7
EN_HV: P1.E U1.14 | length 552.1
  Top Layer w10: P1.E 1620,1551.99 1731.61,1440.37 U1.14
GND: C1.2 C2.2 C3.2 C4.1 C5.1 C8.1 C9.1 C10.1 C21.2 C22.2 C23.2 C24.2 C25.2 C26.2 C27.2 D4.1 D6.1 P1.R/W P1.VSS P2.2 P3.8 P5.2 POWER1.2 POWER1.3 Q1.3 Q2.3 Q3.3 R1.3 R2.2 R3.2 R4.2 R8.1 R9.1 R10.1 R11.1 R21.2 R25.1 R26.1 R31.1 R32.2 R35.2 U1.9 U2.2 U2.4 U2.5 U2.12 U3.5 U3.6 U3.7 U3.8 U3.9 U3.10 U3.11 U3.12 U3.13 U4.1 U4.9 U4.20 U4.21 U5.5 U5.6 U5.7 U5.10 U5.13 U5.17 U6.1 U7.2 | length 4549.2
  Top Layer w5: v1(650,1370) R21.2
  Top Layer w10: U4.9 621.38,1694.69 621.38,1667.26 640.79,1647.85 ; U4.20 801.18,1590.47 801.46,1590.75 801.46,1607.28 v1(814.18,1620) ; U4.1 801.18,1649.53 801.46,1649.25 801.46,1632.72 v1(814.18,1620) ; C5.1 C4.1 830,1853.46 v1(830,1890) ; v1(848.9,1718.19) 848.9,1681.1 C9.1 C8.1 ; C10.1 C8.1 ; v1(1040,1360) 1096.32,1360 R25.1 ; U5.13 1411.61,881.3 U5.17 ; U5.10 1462.8,855.71 U5.17 ; U5.7 U5.6 ; R2.2 R3.2 ; U1.9 v1(1680.43,1694.96) ; C25.2@1710,815.2 1633.11,815.2 C26.2 1568.03,818.31 1556.22,830.12 U5.6 ; v1(1720,2050.47) R3.2 ; R4.2 R3.2 ; C1.2 v1(2120,1344.17) ; v1(814.18,1620) C8.1 ; U5.17 1488.39,804.53 U5.5 U5.6
  Top Layer w20: Q3.3 v1(270,1300) ; P5.2@300.3,1939.47 P5.2 296.46,1930.55 403.07,1823.94 R35.2 ; v1(410,2160) 410,2159.02 395.6,2144.62 395.6,2069.44 404.39,2060.66 410.21,2060.66 421.24,2049.63 U7.2 ; C27.2 v1(615.75,2158.19) ; v1(757.17,2116.54) 783.7,2090 D6.1 ; U6.1 875.38,928.72 v1(875.38,988.46) 875.38,1048.21 C24.2 C23.2 ; C22.2 1070,822.91 1070,962.91 v1(1080,972.91) 1120,1012.91 C21.2 ; v1(1363.03,1130) 1364.72,1128.31 R32.2 ; v1(1629.76,1098.19) 1629.88,1098.07 1629.88,1059.54 R31.1 ; v1(1700,640) 1700.67,639.33 R26.1 ; R8.1 v1(2100,700.31) ; v1(2140,870) D4.1 ; R9.1 v1(2200,700.31) ; R10.1 v1(2300,700.31) ; R11.1 v1(2400,700.31) ; C3.2 2651.4,2347.6 2713.31,2285.69 2742.14,2285.69 U3.5 U3.6 U3.7 U3.8 v1(2742.83,2067.17) ; Q2.3 v1(2740,990) ; Q1.3 2800,1776.28 3136.28,1440 P2.2@3200,1440 ; v1(3090,2060) 3097.17,2067.17 U3.9 U3.10 U3.11 U3.12 U3.13 ; v1(3290,2536.93) C2.2 C2.2@3293.94,2487.4 ; U2.5 U2.4 3386.48,2463.01 3318.33,2463.01 C2.2@3293.94,2487.4 ; U2.12 3472.89,2525.37 3442.59,2525.37 3440.7,2523.48 3401.16,2523.48 3398.95,2525.68 U2.2 3386.48,2525.37 3331.9,2525.37 C2.2@3293.94,2487.4
  other v1: 1430,822.91 1470,862.91 3230,1340 3340.59,1419.5 3097.17,1430 3010,1543.03 3230,1560 3440.7,1560 690,1589.49 639.81,1620 740.2,1620 690,1650.51 3097.17,1680 3351.92,1680 3230,1776.28
LED_DISP: Q1.1 U1.19 | length 1289.1
  Top Layer w10: U1.19@1859.57,1310.61 U1.19 1859.57,1377.73 1886.69,1404.86 2326.07,1404.86 2464.24,1543.03 2553.11,1543.03 2715.02,1704.95 2715.02,1758.05 2797.8,1840.83 2831.02,1840.83 2837.4,1847.21 Q1.1
LED_WAIT: IOL1.7 Q2.1 | length 4599.5
  Top Layer w10: IOL1.7 1970,2230 2234.14,2230 2240,2235.86 2240,2392.56 2300,2452.56 2300,2615.12 2315,2630.12 3609.88,2630.12 3650,2590 3650,1330 3347.4,1027.4 Q2.1
MISO: IOH1.5 P3.2 | length 5330.2
  Bottom Layer w10: IOH1.5 1240,2220 1270,2190 1990,2190 2050,2250 2050,2306.57 2383.43,2640 3510,2640 3570,2580 3570,1450 2910,790 P3.2
MOSI: IOH1.4 P3.3 | length 5218.6
  Bottom Layer w10: IOH1.4 1430,2210 1928.03,2210 1950,2231.97 1950,2330 2275,2655 3535,2655 3610,2580 3610,1390 3010,790 P3.3
NetC6_1: C6.1 U4.5 | length 90.6
  Top Layer w5: C6.1 690,1721.89 699.84,1712.05 U4.5@699.84,1703.51
NetC6_2: C6.2 C7.1 C11.2 C12.1 C13.2 C14.1 C17.1 C18.1 C19.1 U4.2 | length 1058.1
  Top Layer w5: C19.1 C7.1 C12.1 ; C18.1 C12.1 ; C17.1 C14.1 ; v1(580,1720) 578.11,1720 563.59,1705.49 563.59,1582.04 530,1548.45 C14.1 ; v1(650,1900) 650,1866.93 C11.2 C6.2 738.03,1856.93 C13.2@740,1854.96 ; C13.2 C13.2@740,1854.96 ; U4.2 758.9,1748.9 780,1770 780,1814.96 C13.2@740,1854.96 ; C12.1 C14.1
  Bottom Layer w5: v1(580,1720) 580,1830 v1(650,1900)
NetC7_2: C7.2 C12.2 C14.2 P4.1 | length 256.6
  Top Layer w5: P4.1 352.09,1613.41 C7.2 C12.2 C14.2
NetC8_2: C8.2 C9.2 C10.2 R16.1 U4.18 | length 627.6
  Top Layer w5: U4.18 739.21,1527.96 757.17,1510 918.4,1510 v1(920,1508.4) ; C10.2 918.9,1560 948.9,1530 v1(970,1530) ; C9.2 C9.2@918.9,1680
  Top Layer w10: C10.2 C8.2 C9.2 ; C9.2@918.9,1680 948.9,1650 1080.95,1650 R16.1
  Bottom Layer w5: v1(920,1508.4) 948.4,1508.4 v1(970,1530)
NetC11_1: C11.1 U4.6 | length 108.5
  Top Layer w5: C11.1 640,1752.21 677.93,1714.28 U4.6@677.93,1697.19
NetC13_1: C13.1 U4.3 | length 112.4
  Top Layer w5: U4.3@739.21,1712.05 U4.3 739.31,1695.06 739.31,1789.31 C13.1
NetC15_1: C15.1 U4.17 | length 258.1
  Top Layer w5: U4.17 719.53,1527.96 747.48,1500 888.9,1500 930,1458.9 C15.1
NetC15_2: C15.2 C16.2 C17.2 C18.2 C19.2 C20.2 P4.2 U4.19 | length 1073.3
  Top Layer w5: P4.2 362.09,1413.41 C19.2 C18.2 C17.2 ; C17.2@530,1400 610,1320 760,1320 810.85,1370.85 812.81,1370.85 830,1388.03 C16.2 C20.2 C15.2 930,1391.97 960,1421.97 960,1497.07 929.36,1527.72 761.12,1527.72 758.9,1529.94 U4.19
NetC16_1: C16.1 U4.15 | length 211.6
  Top Layer w5: U4.15@680,1544.88 680,1528.11 707.21,1500.91 710.25,1500.91 735.08,1476.08 812.81,1476.08 830,1458.9 C16.1 C16.1@840,1466.93
NetC20_1: C20.1 U4.16 | length 227.8
  Top Layer w5: U4.16 699.84,1527.96 737.8,1490 848.9,1490 880,1458.9 C20.1
NetD1_1: D1.1 Q2.2 | length 750.8
  Top Layer w20: D1.1 2450.94,281.97 2545,376.02 2545,536.6 2517.17,564.43 2517.17,725.01 2584.17,792.01 Q2.2
NetD1_2: D1.2 R7.1 | length 114.1
  Top Layer w20: D1.2 2586.61,297.56 2586.61,327.09 2626.06,366.54 R7.1
NetD2_1: D2.1 R20.1 | length 304.6
  Top Layer w5: R20.1 624.23,1937.09 642,1919.31 709.31,1919.31 740,1950 D2.1
NetD3_1: D3.1 R26.2 | length 199
  Top Layer w20: D3.1 1547.96,700.31 1616.02,700.31 1633.74,682.6 R26.2
NetD4_2: D4.2 R34.1 | length 120.5
  Top Layer w10: R34.1 2138.82,1043.07 D4.2@2140,1041.89
NetD5_1: D5.1 R36.1 | length 122.4
  Top Layer w10: R36.1 817.48,2183.46 D5.1
NetD6_2: D6.2 R37.1 | length 85.1
  Top Layer w10: D6.2 949.06,2080 R37.1
NetL1_2: L1.2 U5.3 U5.4 | length 446.5
  Top Layer w10: U5.3 U5.4 1488.39,754.61 1490.08,752.91 1904.84,752.91 L1.2
NetLS1_N: LS1.N Q3.2 | length 299
  Top Layer w20: Q3.2 88.33,1053.72 LS1.N
NetP1_LED+: P1.LED+ R6.2 | length 132.3
  Top Layer w20: R6.2 2470,1800 P1.LED+
NetP1_LED-: P1.LED- Q1.2 | length 149.2
  Top Layer w20: P1.LED- 2631.63,1850 2647.47,1865.83 Q1.2
NetP1_V0: P1.V0 R1.2 | length 2364.9
  Top Layer w20: R1.2 250,1000 380,1130 620.2,1130 790.2,1300 1235.69,1300 1273.73,1338.04 1273.73,1803.73 P1.V0
NetP5_1: P5.1 SW1.2 | length 278.3
  Top Layer w20: SW1.2 270,2040.83 P5.1
NetQ6_1: Q6.1 U5.12 | length 631.7
  Top Layer w10: U5.12 1411.61,949.13 1420.47,957.99 1420.47,958.76 1449.63,987.91 1559.8,987.91 1568.03,996.15 1568.03,1133.46 1584.58,1150 Q6.1@1860,1150
NetQ6_3: Q6.3 R33.2 R34.2 | length 364
  Top Layer w10: Q6.3 2015.86,1114.14 R34.2 2276.71,1110 2297.77,1131.06 R33.2@2297.77,1135
NetR2_1: R2.1 U1.5 | length 414.1
  Top Layer w10: R2.1 1643.94,1945.35 1690.36,1898.93 1729.76,1898.93 1761.5,1867.19 1761.5,1779.35 1782.8,1758.05 U1.5
NetR3_1: R3.1 U1.4 | length 368.4
  Top Layer w10: R3.1 1723.94,1945.35 1738.62,1930.67 1738.62,1926.73 1778.5,1886.85 1778.5,1832.81 1808.39,1802.93 U1.4
NetR4_1: R4.1 U1.3 | length 384.8
  Top Layer w10: R4.1 1800,1897.35 1805.86,1891.5 1837.19,1891.5 1861.5,1867.19 1861.5,1799.83 1833.98,1772.31 U1.3
NetR5_1: R5.1 U1.6 | length 425.1
  Top Layer w10: R5.1 1563.73,1945.35 1610.16,1898.93 1629.76,1898.93 1678.5,1850.18 1678.5,1832.81 1757.2,1754.11 U1.6
NetR16_2: R16.2 R17.1 | length 60
  Top Layer w10: R17.1 R16.2
NetR17_2: R17.2 R19.2 R24.2 U4.14 | length 621.9
  Top Layer w5: U4.14 660.47,1519.53 684.78,1495.22 684.78,1480.33 698.03,1467.09 R19.2 701.97,1467.09 729.06,1440 v1(770,1440)
  Top Layer w10: v1(1020,1530) 1022.61,1532.61 1026.54,1532.61 R17.2@1081.46,1587.52 ; R17.2@1080,1588.03 R17.2 R17.2@1081.46,1587.52 ; R24.2 1098.03,1527.72 1081.46,1544.29 R17.2@1081.46,1587.52
  Bottom Layer w10: v1(770,1440) 930,1440 v1(1020,1530)
NetR18_1: R18.1 U4.12 | length 86.7
  Top Layer w5: R18.1 600,1506.85 621.1,1527.96 U4.12
NetR18_2: R18.2 R19.1 | length 216.6
  Top Layer w5: R18.2 600,1360 620,1340 680,1340 700,1360 R19.1
NetR20_2: R20.2 R22.2 U4.7 | length 252.8
  Top Layer w5: R20.2 531.97,1880 576.55,1835.42 576.55,1832.89 589.8,1819.64 R22.2@591.77,1819.64 ; R22.2 581.97,1825.08 595.22,1811.83 595.22,1809.86 612.81,1792.26 612.81,1765.24 658.25,1719.81 658.25,1697.19 U4.7
NetR21_1: R21.1 U4.10 U4.11 U4.13 | length 385.8
  Top Layer w5: U4.11 595.36,1528.53 574.78,1507.95 574.78,1448.23 579.18,1443.84 624.78,1443.84 648.03,1467.09 R21.1 650,1518.74 640.79,1527.96 U4.13
  Top Layer w10: U4.11 591.7,1590.47 591.42,1590.75 591.42,1649.25 591.7,1649.53 U4.10
NetR24_1: R24.1 R25.2 | length 57.2
  Top Layer w10: R25.2 R24.1
NetR27_2: R27.2 U5.11 | length 552
  Top Layer w10: U5.11 1437.2,949.13 1446.07,957.99 1446.07,958.76 1460.22,972.91 1584.58,972.91 1590.43,978.77 1590.43,1114.14 1596.29,1120 1740,1120 1761.38,1098.62 1761.38,1074.1 1776.06,1059.41 R27.2
NetR28_1: R28.1 R31.2 U5.9 | length 260
  Top Layer w10: U5.9 1563.46,929.88 1616.02,982.44 R31.2@1616.02,992.48 ; R31.2 1633.94,992.48 1648.62,1007.17 1648.62,1011.97 1696.06,1059.41 R28.1
NetR29_1: R29.1 R30.1 | length 165.8
  Top Layer w10: R30.1 1471.69,1092.21 1481.73,1082.17 1481.73,1035.32 1491.77,1025.28 R29.1 ; R29.1@1509.17,1010.83 R29.1@1536.97,1010.83
NetR30_2: R30.2 R32.1 U5.14 | length 302.4
  Top Layer w10: R32.1@1359.09,1010.83 1344.41,996.15 1344.41,992.21 1310,957.8 1310,862.91 1317.2,855.71 U5.14 ; R32.1@1360.79,1025.28 R32.1 R30.2
NetR35_1: R35.1 U7.5 | length 319.3
  Top Layer w10: R35.1 R35.1@484.69,1834.69
  Top Layer w20: R35.1 470,1940.02 478.29,1948.31 478.29,2055.45 509.87,2087.03 U7.5
NetR36_2: R36.2 R37.2 U7.1 | length 711.2
  Top Layer w10: U7.1 451.92,2087.03 458.29,2093.41 458.29,2128.42 509.87,2180 632.6,2180 692.6,2120 696.54,2120 R36.2 703.94,2116.54 770,2050.47 818.85,2050.47 856.25,2013.07 R37.2
QI_C\H\G\: AD1.1 R22.1 R23.2 | length 2902.2
  Top Layer w5: v1(430,1770) 527.09,1770 R23.2 540.36,1762.56 R22.1@591.77,1762.56 ; v1(640,540) 680,500 1900,500 AD1.1
  Bottom Layer w5: v1(430,1770) 550,1650 550,630 v1(640,540)
RS_HV: P1.RS U1.13 | length 624.3
  Top Layer w10: P1.RS 1420,1663.76 1706.02,1377.73 U1.13
SCK: IOH1.6 P3.1 | length 5485.2
  Bottom Layer w10: IOH1.6 1140,2190 1170,2160 2068.03,2160 2140,2231.97 2140,2340 2420,2620 3500,2620 3540,2580 3540,1520 2810,790 P3.1
SCL_HV: Q4.3 R13.2 U1.1 | length 749.4
  Top Layer w10: U1.1 1935.83,1615.83 2070,1750 2070,1858.68 2126,1914.69 2155.6,1914.69 2204.54,1963.62 2204.54,1984.11 2210.43,1990 Q4.3 2313.96,1990 2347.42,1956.54 R13.2
SCL_LV: IOH1.10 Q4.2 R12.2 U2.14 U3.16 | length 3425
  Top Layer w10: v1(2280,2090) 2295.83,2074.17 Q4.2 2314.46,2027.4 2351.86,1990 2432.6,1990 2466.06,2023.46 R12.2 2473.94,2023.46 2488.62,2038.15 2488.62,2046.02 v1(2600,2157.4) 2600,2550 2629.57,2579.57 3070,2579.57 ; U3.16 3097.17,2552.4 3070,2579.57 ; U2.14@3424.62,2579.57 3070,2579.57
  Bottom Layer w10: IOH1.10 930,2110 2260,2110 v1(2280,2090)
SDA_HV: Q5.3 R15.2 U1.2 | length 573.9
  Top Layer w10: U1.2 1859.57,1731.55 1878.5,1750.48 1878.5,1984.11 1884.4,1990 1983.96,1990 2017.42,1956.54 R15.2
SDA_LV: IOH1.9 Q5.2 R14.2 U2.13 U3.15 | length 4025.2
  Top Layer w10: IOH1.9 920.47,2219.53 1755.08,2219.53 1947.21,2027.4 Q5.2 1984.46,2027.4 2021.86,1990 2102.6,1990 2136.06,2023.46 R14.2 2143.94,2023.46 2255.47,2135 v1(2520,2135) 2580,2195 2580,2559.57 2635.55,2615.12 3438.63,2615.12 3466.5,2587.25 3466.5,2564.12 3471.88,2558.74 3527.28,2558.74 3533.14,2552.88 3533.14,2340.86 3527.28,2335 3288.63,2335 3188.63,2435 U3.15
VBUS_BATT_3V7: C25.1 C26.1 L1.1 Q6.2 R27.1 R28.2 SW1.3 U5.8 U7.3 | length 6081.1
  Top Layer w10: U5.8 1556.22,881.3 1574.92,900 C26.1@1640.83,900 ; R28.2 1696.06,992.48 1681.38,977.8 1681.38,940.55 C26.1@1640.83,900 ; C25.1@1718.39,900 C26.1@1640.83,900 ; R27.1 1780,950.79 C25.1@1729.21,900 ; Q6.2 1869.37,946.46 1903.74,912.09 L1.1 ; L1.1@1903.74,910.39 1760,910.39 1749.61,900 C25.1@1729.21,900 ; C25.1@1729.21,900 1725.28,900 1721.83,896.56 C25.1 1722.32,893.11 C25.1@1729.21,900
  Top Layer w20: v1(30,240) 56.38,213.62 373.62,213.62 400,240 400,404.64 595.36,600 1200.66,600 1264.06,536.6 1869.37,536.6 2070,737.23 2070,782.3 2014.65,837.65 2014.65,882.72 1985.28,912.09 1910.43,912.09 L1.1 ; SW1.3 v1(368.43,2183.46) 368.43,2061.27 394.04,2035.66 398.56,2035.66 421.08,2013.13 436.05,2013.13 U7.3
  Bottom Layer w20: v1(30,240) 30,2140 73.46,2183.46 v1(368.43,2183.46)
VBUS_BKP_3V0: P2.1 U3.14 | length 1739.2
  Top Layer w20: U3.14 3123.74,2385 3151.54,2357.21 3151.54,2008.95 3175.48,1985 P2.1@3230,1985
  Top Layer w50: P2.1@3230,1135 3305.5,1135 3590,1419.5 3590,1700.5 3305.5,1985 P2.1@3230,1985
VBUS_CHRG_5V0: C4.2 C5.2 C27.1 D2.2 D5.2 U4.4 U7.4 | length 1395.2
  Top Layer w10: U4.4 719.76,1695.2 719.76,1739.76 v1(720,1740) ; v1(890,1740) 890,1796.54 C5.2 C4.2 893.46,1908.86 932.64,1948.03 D2.2 932.64,1951.97 934.61,1950 1070,1950 1100,1980 1100,2100 1020,2180 D5.2
  Top Layer w20: U7.4 592.13,2012.23 611.81,2031.91 627.4,2016.32 667.07,2016.32 669.02,2014.37 v1(670,2014.37)
  Bottom Layer w10: v1(720,1740) v1(890,1740)
  Bottom Layer w20: v1(670,2014.37) 720,1964.37 v1(720,1740)
VBUS_IOREF: POWER1.7 Q4.1 Q5.1 R12.1 R14.1 S1.1 S2.1 S3.1 S4.1 | length 5815
  Top Layer w10: v1(1965.83,1772.31) Q5.1 1984.46,1952.6 2010.21,1926.85 2087.76,1926.85 2094.57,1933.66 2094.57,1949.73 2101.38,1956.54 R14.1 R14.1@2143.94,1956.54 ; v1(2280,1738.41) 2278.5,1739.91 2278.5,1946.22 2284.88,1952.6 Q4.1 2314.46,1952.6 2340.21,1926.85 2436.38,1926.85 2466.06,1956.54 R12.1 R12.1@2473.94,1956.54
  Top Layer w20: S1.1@496.65,100 725,100 875,100 1103.35,100 v1(1260,100) 1425,100 1653.35,100 1800,100 S4.1@2028.35,100 ; v1(2320,1060) 2320,954.53 2470,804.53 v1(2470,510)
  Bottom Layer w10: v1(1965.83,1772.31) 1967.69,1772.31 2040,1700 2160,1700 2234.96,1700 2235.86,1699.11 2240.69,1699.11 v1(2280,1738.41)
  Bottom Layer w20: POWER1.7 POWER1.7@1200,392.8 ; v1(1260,100) 1200,160 POWER1.7@1200,392.8 ; 2160,1700 2320,1540 v1(2320,1060) ; v1(2470,510) 2430,470 1910,470 1890,450 1890,340 1860,310 1270,310 1238.83,341.17 1238.83,353.97 POWER1.7@1200,392.8
VBUS_SYS_3V3: C2.1 C3.1 C24.1 LS1.P P3.9 R7.2 R23.1 U2.1 U2.6 U2.7 U3.2 U6.2 U6.4 | length 1926.4
  Top Layer w10: U3.2 U3.2@2770.39,2435 ; U2.1 3385.23,2558.74 3248.74,2558.74 3230,2540 3230,2468.66 3286.06,2412.6 C2.1 3340.59,2412.6 3351.92,2401.26 3424.62,2401.26 U2.7 U2.7@3430,2387.42
  Top Layer w20: U6.4 U6.2 784.65,1028.35 800.75,1044.45 C24.1 ; C3.1 2701.89,2422.4 2714.49,2435 U3.2
  Bottom Layer w20: LS1.P 407.95,812.05 v1(490,730)
  Bottom Layer w100: v1@610,170 957.88,517.88 v1(957.88,680.51)
  other v1: 610,160 585,175 640,175 610,196.93 957.88,639.33 930,660 980,660
VBUS_SYS_5V0: C1.1 C21.1 C22.1 C23.1 D3.2 P1.VDD POWER1.4 R1.1 R5.2 R6.1 R13.1 R15.1 R29.2 U1.20 U5.1 U5.15 U5.16 U6.3 | length 7226.6
  Top Layer w10: 1361.69,761.22 1366.97,755.95 U5.1 ; U1.20 C1.1